# Altium PCB NS6202_V4.0_SDCARD.PcbDoc
Units mm, origin at the board's own origin, x right, y up, seen from the top; angles counter-clockwise.
Board outline 18 x 26 mm, 2 copper layers (Top Layer, Bottom Layer); 10 components, 11 nets, 56 pads, 2 vias.
Unrouted connection lines stored in the file: 26.
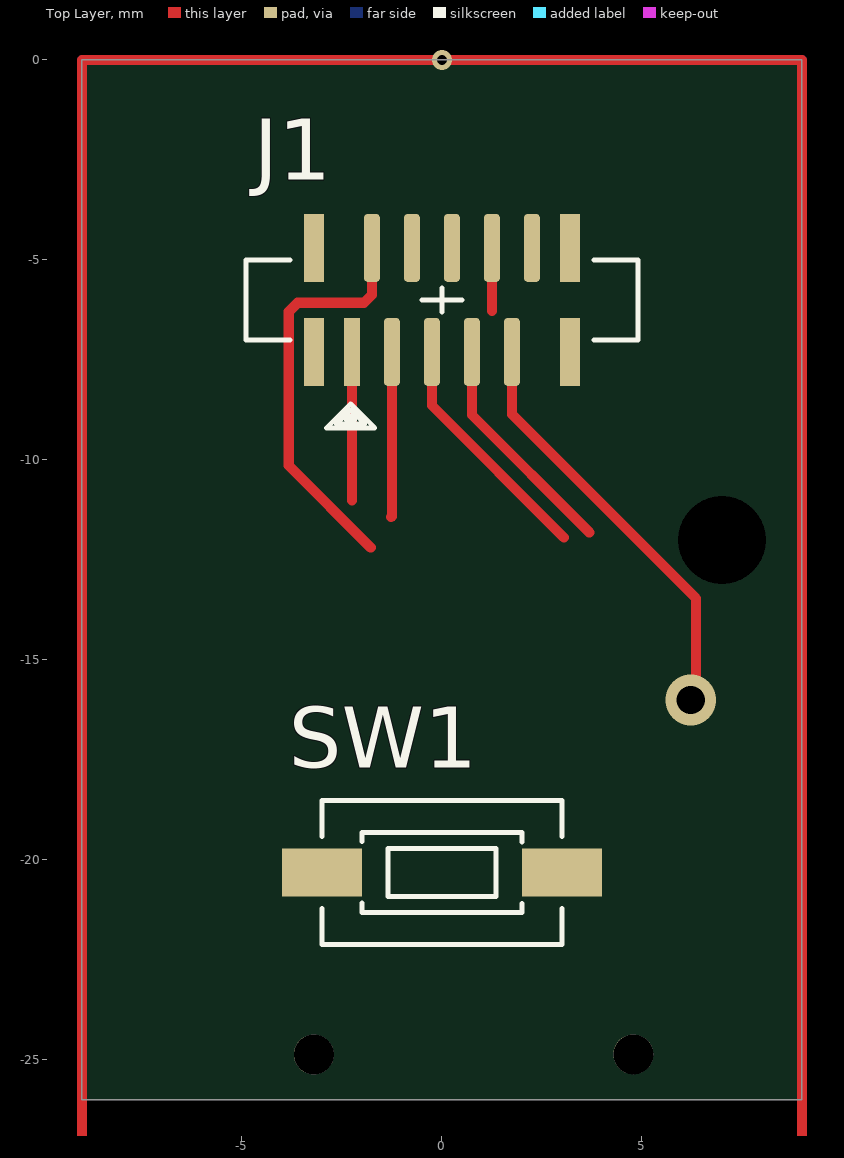
[diagram p0: Top Layer view]
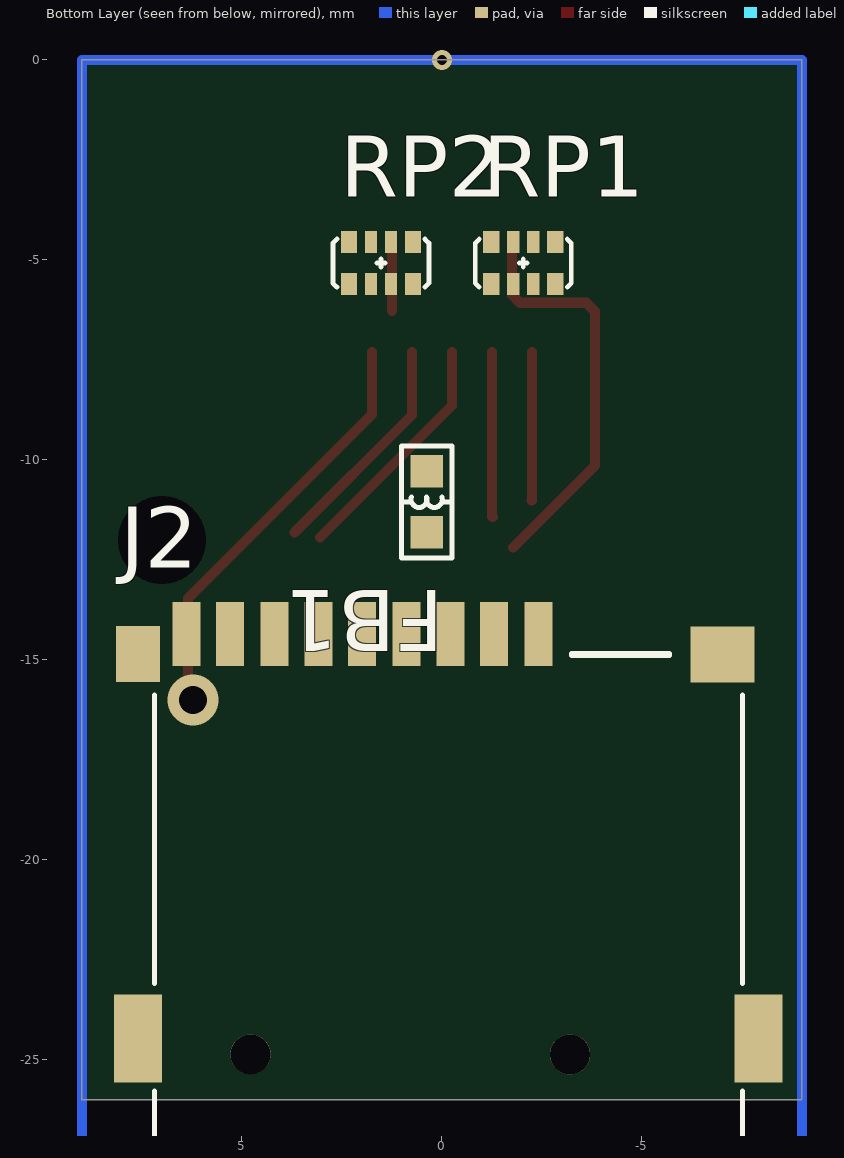
[diagram p1: Bottom Layer view, seen from below]

## Layer stack, top to bottom
Top Solder: solder mask 0.0102, Solder Resist, Dk 3.5
Top Layer: signal copper 0.0356
Dielectric 1: dielectric 0.32, FR-4, Dk 4.8
Bottom Layer: signal copper 0.0356
Bottom Solder: solder mask 0.0102, Solder Resist, Dk 3.5

## Board outline
-9,-26 -9,0 9,0 9,-26

## Design rules (kind name [scope] priority, off if disabled: settings)
Clearance [All] p1: gap=0.254 ignorepadtopadclearanceinfootprint=FALSE except(0: Arc-Hole Track-Hole SMDPad-Hole THPad-Hole Via-Hole Fill-Hole Poly-Hole Region-Hole Text-Hole)
PolygonConnect [All] p1: connectstyle=Relief reliefconductorwidth=0.254 reliefentries=4 polygonreliefangle="90 Angle" airgapwidth=0.254
RoutingVias [All] p1: holewidth=0.711 width=1.27 viastyle="Through Hole" minholewidth=0.711 minwidth=1.27 maxholewidth=0.711 maxwidth=1.27
SolderMaskExpansion [All] p1: expansion=0.102
Width [All] p1: maxlimit=0.254 minlimit=0.254 preferedwidth=0.254
30 further rules are at their usual default settings.

## Components (designator, comment, footprint, x,y, rotation, side; value= is the part's Value field where it differs from the comment)
BC1 "22uF" CS-2012 16.891,-9.779 r0 top
C1 "1nF" CS-1005 11.176,-9.317 r0 top
FB1 "60" LS-1608 0.381,-11.049 r270 bottom
J1 "05005HS-40" 05005HS-10P 0,-6 r0 top
J2 "CON_u-SD" CON_u-SD -2.413,-14.351 r0 bottom
MH1 "4.04pi" VA-2.2 34.417,-20.701 r0 top
MH2 "4.04pi" VA-2.2 -15.367,-6.985 r0 top
RP1 "10K" RP-4_1005 -2.032,-5.08 r0 bottom
RP2 "10K" RP-4_1005 1.524,-5.08 r0 bottom
SW1 "SW PB" SWS-CTT-1131U 0,-20.32 r180 top

## Footprints (in the part's own frame and the unit in brackets; to place one, negate y for a bottom-side part, rotate by r counter-clockwise, add the part's x,y. Pads: shape width x height; smd on the part's side, far side on the other; paste and mask are expansions set on the pad)
05005HS-10P [mm]
  rect 0.4x1.7 smd: 1(-2.25,-1.3)
  rrect50% 0.4x1.7 smd: 2(-1.75,1.3) 3(-1.25,-1.3) 4(-0.75,1.3) 5(-0.25,-1.3) 6(0.25,1.3) 7(0.75,-1.3) 8(1.25,1.3) 9(1.75,-1.3) 10(2.25,1.3)
  rect 0.5x1.7 smd: M1(-3.2,1.3) M2(-3.2,-1.3) M3(3.2,1.3) M4(3.2,-1.3)
  silkscreen extent -4.9,-3.2 4.9,1
CON_u-SD [mm]
  rect 0.7x1.6 smd: 1(0,0) 2(1.105,0) 3(2.201,0) 4(3.303,0) 5(4.407,0) 6(5.504,0) 7(6.6,0) 8(7.705,0) CD(8.801,0)
  rect 1.1x1.4 smd: 9(10.006,0.499)
  rect 1.6x1.4 smd: 10(-4.596,0.508)
  rect 1.2x2.2 smd: 11(10.012,10.108) 12(-5.497,10.108)
  round 1 hole 1: 13(7.198,10.509) 14(-0.79,10.513)
  silkscreen extent -5.1,0.48 9.6,14.51
CS-1005 [mm]
  rect 0.5x0.6 smd: 1(-0.45,0) 2(0.45,0)
  silkscreen extent -0.76,-0.51 0.76,0.51
CS-2012 [mil]
  rect 55x55 smd: 1(-42.5,0) 2(42.5,0)
  silkscreen extent -75,-40 75,40
LS-1608 [mil]
  rect 32x32 smd: 1(-30,0) 2(30,0)
  silkscreen extent -55,-25 55,25
RP-4_1005 [mm]
  rect 0.406x0.55 smd: 1(-0.8,0.525) 2(-0.8,-0.525) 7(0.8,0.525) 8(0.8,-0.525)
  rect 0.305x0.55 smd: 3(-0.25,0.525) 4(-0.25,-0.525) 5(0.25,0.525) 6(0.25,-0.525)
  silkscreen extent -1.2,-0.6 1.2,0.6
SWS-CTT-1131U [mm]
  rect 2x1.2 smd: 1(-3,0) 2(3,0)
  silkscreen extent -3,-1.8 3,1.8
VA-2.2 [mm]
  rrect100% 4x4 hole 2.2: 1(0,0)

## Free pads (board coordinates)
  round 1.524 hole 2.2: 1(7,-12)

## Via types
v1: diameter 1.27, hole 0.711, Top Layer to Bottom Layer, 1 vias
v2: diameter 0.5, hole 0.25, Top Layer to Bottom Layer, tented both sides, 1 vias

## Nets (pads, with @x,y where several pads share a name; then routed paths per layer and width w, separated by ;. In a path a pad name is that pad's centre, name@x,y a point inside that pad or via, vN(x,y) a via of type N, cw(c..) or ccw(c..) an arc to the next point about the centre after c; other vN are vias at no path point)
+3.3V: FB1.1 J1.4 RP1.2 RP1.4 RP1.6 RP1.8 RP2.2 RP2.4 RP2.6 RP2.8
FD_SW: C1.1 J1.10 SW1.2
GND: BC1.1 C1.2 J1.6 J1.M1 J1.M2 J1.M3 J1.M4 J2.6 J2.9 J2.10 J2.11 J2.12 MH1.1 MH2.1 SW1.1
N17360855: BC1.2 FB1.2 J2.4
SD0_CLK: J1.5 J2.5 RP2.1 | length 6
  Top Layer w0.254: J1.5 -0.25,-8.64 3.048,-11.938
SD0_CMD: J1.3 J2.3 RP1.5 | length 4.1
  Top Layer w0.254: -1.27,-11.43 -1.25,-11.41 J1.3
SD0_DATA0: J1.7 J2.7 RP2.3 | length 5.7
  Top Layer w0.254: J1.7 0.75,-8.878 3.683,-11.811
SD0_DATA1: J1.8 J2.8 RP2.5 | length 1.6
  Top Layer w0.254: 1.25,-6.27 J1.8
SD0_DATA2: J1.1 J2.1 RP1.7 | length 3.7
  Top Layer w0.254: J1.1 -2.25,-11.002 -2.244,-11.007
SD0_DATA3: J1.2 J2.2 RP1.3 | length 10.2
  Top Layer w0.254: -1.778,-12.192 -3.831,-10.139 -3.831,-6.292 -3.608,-6.069 -1.948,-6.069 -1.75,-5.871 J1.2
SD0_INS: J1.9 J2.CD RP2.7 | length 10.7
  Top Layer w0.254: J1.9 1.75,-8.862 6.35,-13.462 6.35,-15.875 v1(6.223,-16.002)
pads on no net: J2.13 J2.14 RP1.1
copper on no net:
  other v2: 0,0

## Other copper
Multi-Layer:
  lines w0.254: -9,-28.067 -9,0 9,0 9,-28.067 -9,-28.067